# Altium PCB CAN_OD节点V11.PcbDoc
Units mil, origin at the board's own origin, x right, y up, seen from the top; angles counter-clockwise.
Board outline 1115.03 x 910.03 mil, 2 copper layers (Top Layer, Bottom Layer); 34 components, 61 nets, 149 pads, 38 vias.
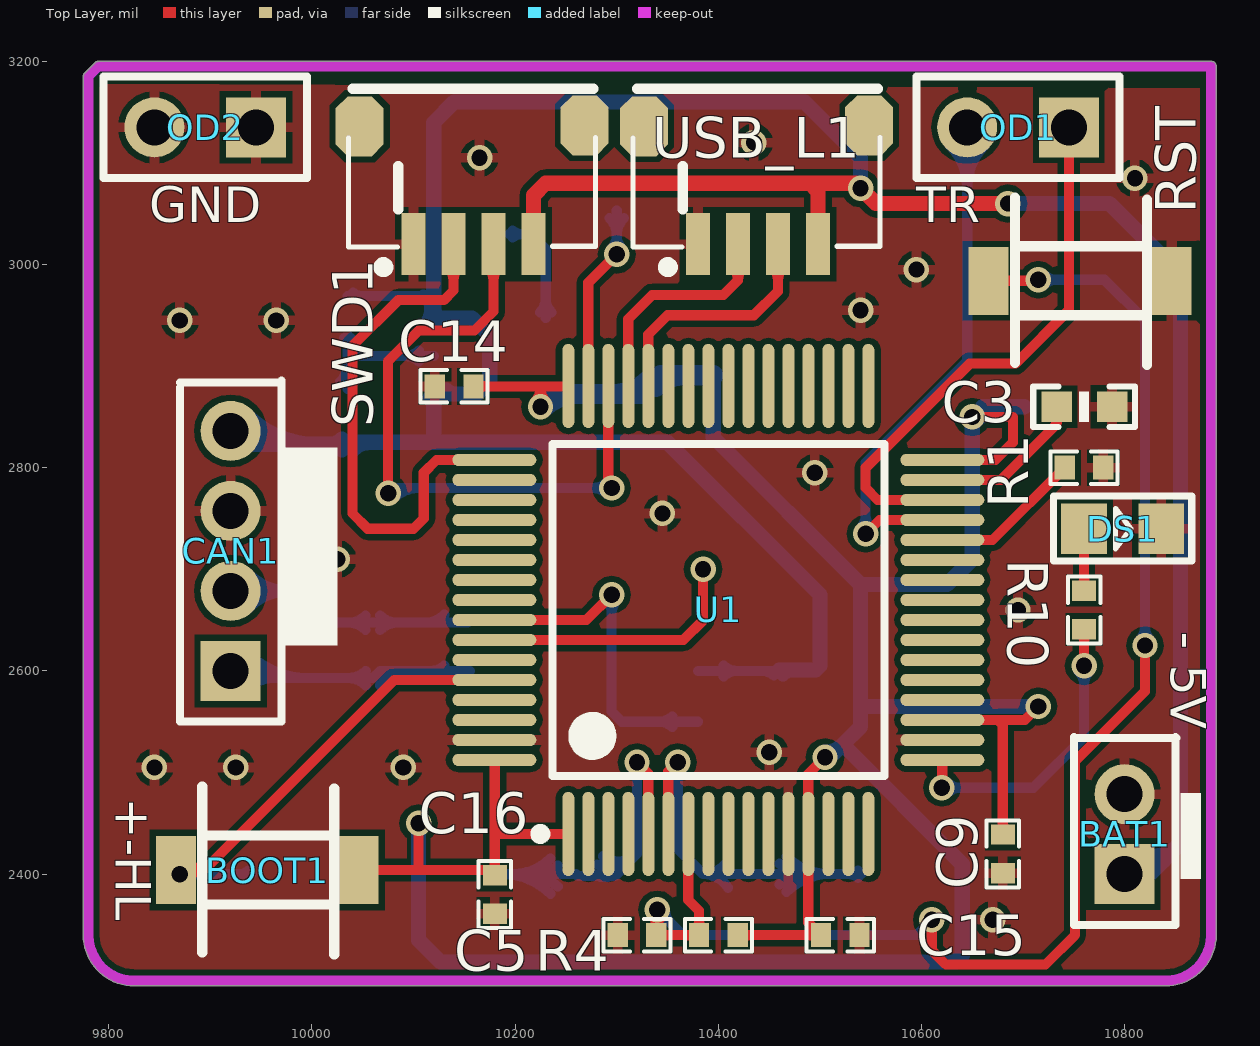
[diagram p0: Top Layer view]
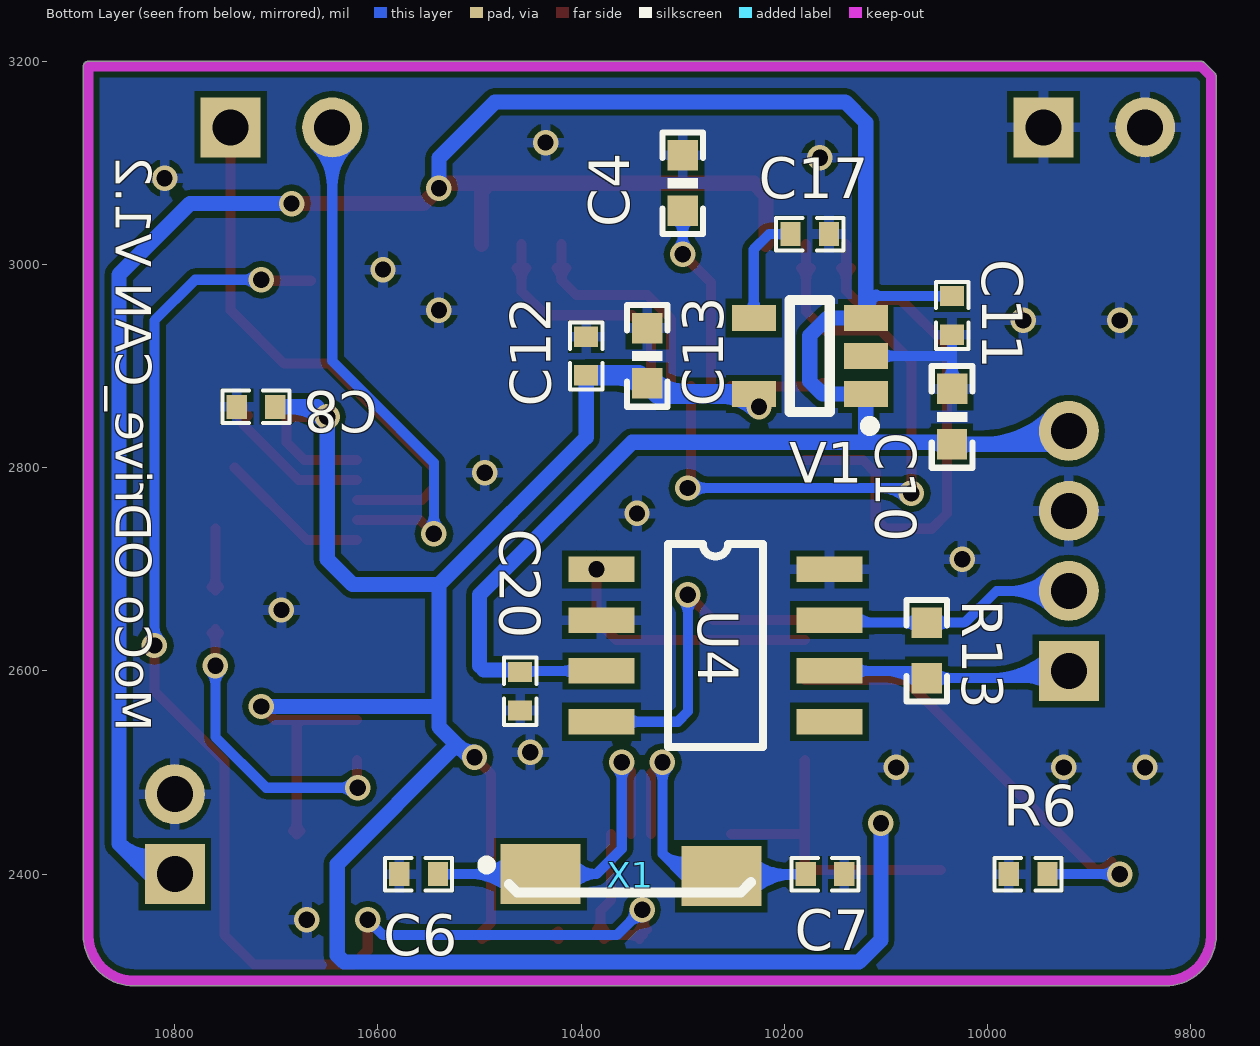
[diagram p1: Bottom Layer view, seen from below]
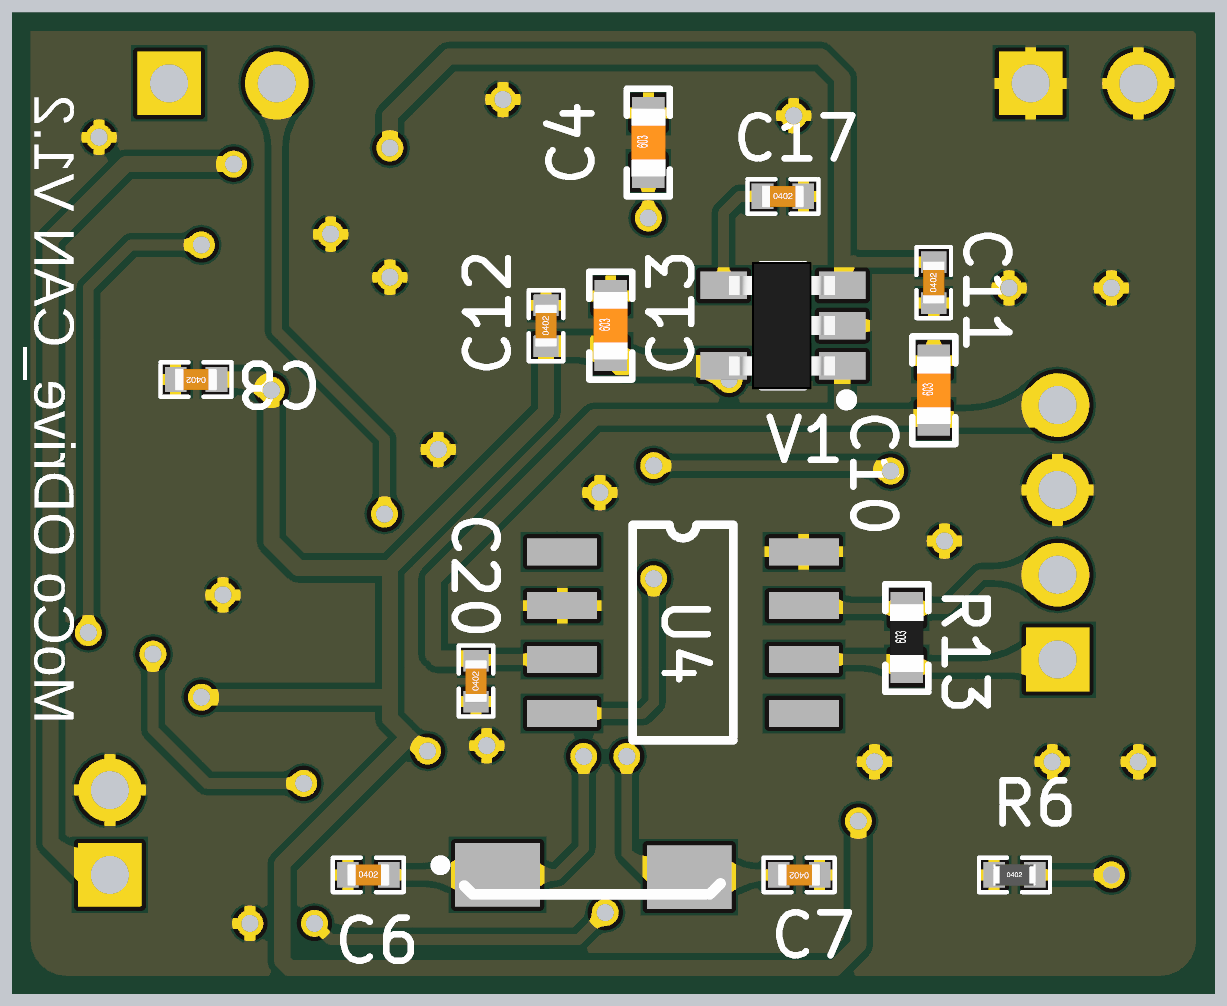
[diagram p2: 3D render of the assembled board from below, using the file's embedded part models]

## Layer stack, top to bottom
Top Layer: signal copper 1.4
Dielectric: dielectric 12.6, FR-4, Dk 4.8
Bottom Layer: signal copper 1.4

## Board outline
9774.99,2340 9774.99,3185 cw(c9780,3185) 9776.47,3188.56 9776.45,3188.55 9786.45,3198.55 9786.44,3198.53 cw(c9790,3195) 9790,3200.01 10885,3200.01 cw(c10885,3195) 10890.01,3195 10890.01,2340 cw(c10840,2340) 10840,2289.99 9825,2289.99 cw(c9825,2340)

## Design rules (kind name [scope] priority, off if disabled: settings)
Clearance [All] p1: gap=6
PolygonConnect [All] p1: connectstyle=Relief reliefconductorwidth=10 reliefentries=4 polygonreliefangle="90 Angle"
RoutingVias [All] p1: holewidth=28 width=50 viastyle="Through Hole" minholewidth=16 minwidth=25 maxholewidth=28 maxwidth=50
SilkscreenOverComponentPads [All] p1: minsilkscreentomaskgap=10
SolderMaskExpansion [All] p1: expansion=4
Width [All] p1: maxlimit=30 minlimit=10 preferedwidth=10 minimp=50.000000 maximp=50.000000 favimp=50.000000
27 further rules are at their usual default settings.

## Components (designator, comment, footprint, x,y, rotation, side; value= is the part's Value field where it differs from the comment)
BAT1 "Header 2" PH2.0-2 10800,2400 r90 top
BOOT1 "Header 2" 663*4*2.0/2.5mm 9920,2420 r0 top
C3 "2.2UF" C0603 10760,2860 r0 top
C4 "2.2UF" C0603 10300,3080 r90 bottom
C5 "10NF" "C 0402" 10320,2340 r0 top
C6 "20PF" "C 0402" 10560,2400 r180 bottom
C7 "20PF" "C 0402" 10160,2400 r0 bottom
C8 "0.1UF" "C 0402" 10720,2860 r0 bottom
C9 "0.1UF" "C 0402" 10680,2420 r270 top
C10 "10uF" C0603 10035,2850 r90 bottom
C11 "0.1uF" "C 0402" 10035,2950 r90 bottom
C12 "0.1uF" "C 0402" 10395,2910 r90 bottom
C13 "10uF" C0603 10335,2910 r90 bottom
C14 "0.1UF" "C 0402" 10140,2880 r180 top
C15 "0.1UF" "C 0402" 10520,2340 r0 top
C16 "0.1UF" "C 0402" 10180,2380 r270 top
C17 "0.1uF" "C 0402" 10175,3030 r180 bottom
C20 "0.1UF" "C 0402" 10460,2580 r90 bottom
CAN1 "Header 4" PH2.0-4 9920,2600 r90 top
DS1 "LED1" SMDLED 10760,2740 r0 top
OD1 "Header 2" HDR1X2 10745,3135 r180 top
OD2 "Header 2" HDR1X2 9945,3135 r180 top
R1 "10K" "R 0402" 10760,2800 r180 top
R4 "10K" "R 0402" 10400,2340 r0 top
R6 "10K" "R 0402" 9960,2400 r180 bottom
R10 "100R" "R 0402" 10760,2660 r90 top
R13 "120R" R0603 10060,2620 r90 bottom
RST "Header 2" 663*4*2.0/2.5mm 10720,3000 r0 top
SWD1 "Header 4" "SH1.0-4P - up" 10100,3020 r0 top
U1 "STM32F405RGT6" LQFP64_M 10400,2660 r90 top
U4 "TJA1050" SOP-8 10380,2700 r180 bottom
USB_L1 "Header 4" "SH1.0-4P - up" 10380,3020 r0 top
V1 "RT9193-3.3/LP2985/SPX3819" SOT23-5 10175,2910 r180 bottom
X1 "8MHZ" PXCL 10440,2400 r270 bottom

## Footprints (in the part's own frame and the unit in brackets; to place one, negate y for a bottom-side part, rotate by r counter-clockwise, add the part's x,y. Pads: shape width x height; smd on the part's side, far side on the other; paste and mask are expansions set on the pad)
663*4*2.0/2.5mm [mil] "小龟按键"
  rect 39.37x66.93 smd: 1(126,-16) 2(-54,-16)
  silkscreen extent -28,-99 102,66
C0603 [mil]
  rect 30x30 smd: 1(-27,0) 2(27.5,-0.06)
  silkscreen extent -50,-20 50,20, body extent -31,-16 31,16, height 12
"C 0402" [mil]
  rect 20x23.62 smd: 1(-19,0) 2(19,0)
  silkscreen extent -33,-16 33,16, body extent -20,-10 20,10, height 20
HDR1X2 [mm] "Connector; Header; 2 Position"
  rect 1.5x1.5 hole 0.9: 1(0,0)
  round 1.5 hole 0.9: 2(2.54,0)
  silkscreen extent -1.27,-1.27 3.81,1.27
LQFP64_M [mm] "Thin QFP, 64-Leads, Body 10x10mm, Pitch 0.5mm, IPC Low Density"
  oval 2.1x0.3 smd: 1(-5.6,3.75) 2(-5.6,3.25) 3(-5.6,2.75) 4(-5.6,2.25) 5(-5.6,1.75) 6(-5.6,1.25) 7(-5.6,0.75) 8(-5.6,0.25) 9(-5.6,-0.25) 10(-5.6,-0.75) 11(-5.6,-1.25) 12(-5.6,-1.75) 13(-5.6,-2.25) 14(-5.6,-2.75) 15(-5.6,-3.25) 16(-5.6,-3.75) 33(5.6,-3.75) 34(5.6,-3.25) 35(5.6,-2.75) 36(5.6,-2.25) 37(5.6,-1.75) 38(5.6,-1.25) 39(5.6,-0.75) 40(5.6,-0.25) 41(5.6,0.25) 42(5.6,0.75) 43(5.6,1.25) 44(5.6,1.75) 45(5.6,2.25) 46(5.6,2.75) 47(5.6,3.25) 48(5.6,3.75)
  oval 0.3x2.1 smd: 17(-3.75,-5.6) 18(-3.25,-5.6) 19(-2.75,-5.6) 20(-2.25,-5.6) 21(-1.75,-5.6) 22(-1.25,-5.6) 23(-0.75,-5.6) 24(-0.25,-5.6) 25(0.25,-5.6) 26(0.75,-5.6) 27(1.25,-5.6) 28(1.75,-5.6) 29(2.25,-5.6) 30(2.75,-5.6) 31(3.25,-5.6) 32(3.75,-5.6) 49(3.75,5.6) 50(3.25,5.6) 51(2.75,5.6) 52(2.25,5.6) 53(1.75,5.6) 54(1.25,5.6) 55(0.75,5.6) 56(0.25,5.6) 57(-0.25,5.6) 58(-0.75,5.6) 59(-1.25,5.6) 60(-1.75,5.6) 61(-2.25,5.6) 62(-2.75,5.6) 63(-3.25,5.6) 64(-3.75,5.6)
  silkscreen extent -5.72,-4.15 4.15,4.57, body extent -5,-5 5,5, height 1.6
PH2.0-2 [mm]
  rect 1.5x1.5 hole 0.9: 1(0,0)
  round 1.5 hole 0.9: 2(2,0)
  silkscreen extent -1.27,-1.3 3.43,1.27
PH2.0-4 [mm]
  rect 1.5x1.5 hole 0.9: 1(0,0)
  round 1.5 hole 0.9: 2(2,0) 3(4,0) 4(6,0)
  silkscreen extent -1.27,-1.27 7.26,1.27
PXCL [mm]
  rect 1.5x2 smd: 1(0,0) 2(0.051,4.521)
  silkscreen extent -0.34,-1.45 0.46,5.26
R0603 [mil]
  rect 30x30 smd: 1(-27,0) 2(27.5,-0.06)
  silkscreen extent -50,-20 50,20, body extent -31,-16 31,16, height 12
"R 0402" [mil]
  rect 20x23.62 smd: 1(-19,0) 2(19,0)
  silkscreen extent -33,-16 33,16, body extent -20,-10 20,10, height 12
"SH1.0-4P - up" [mm]
  rect 0.6x1.55 smd: 1(0,0) 2(1,0) 3(2,0) 4(3,0)
  oct 1.2x1.5 smd: 1.(4.279,2.972) A(-1.346,2.946)
  silkscreen extent -1.63,-0.7 4.55,3.89
SMDLED [mil]
  rect 45x50 smd: 1(0,0) 2(76.01,0)
  silkscreen extent -30,-32 106,32
SOP-8 [mil]
  rect 65x25 smd: 1(0,0) 2(0,-50) 3(0,-100) 4(0,-150) 5(224.41,-150) 6(224.41,-100) 7(224.41,-50) 8(224.41,0)
  silkscreen extent 65,-175 159,25
SOT23-5 [mm]
  rect 1.1x0.65 smd: 1(1.4,-0.95) 2(1.4,0) 3(1.4,0.95) 4(-1.4,0.95) 5(-1.4,-0.95)
  silkscreen extent -0.5,-1.87 1.62,1.4, body extent -1.28,-1.5 1.22,1.5, height 1.05

## Part data
BAT1 BOOT1 OD1 OD2 RST: "Header, 2-Pin"
C3 C4: library part CAP1, "胆电容"
C5 C8 C9 C10 C12 C13 C14 C15 C16 C20: library part CAP, "Capacitor"
C6 C7: library part C2, "0805"
C11 C17: library part Capacitor, "普通电容"
CAN1 SWD1 USB_L1: "Header, 4-Pin"
DS1: library part LED2, "Typical RED, GREEN, YELLOW, AMBER GaAs LED"
R1 R4 R6 R10 R13: library part Res2, "0603"
U4: library part SN65HVD230D
V1: "降压IC"
X1: library part XTAL, "Crystal Oscillator"

## Via types
v1: diameter 25, hole 16, Top Layer to Bottom Layer, 38 vias

## Nets (pads, with @x,y where several pads share a name; then routed paths per layer and width w, separated by ;. In a path a pad name is that pad's centre, name@x,y a point inside that pad or via, vN(x,y) a via of type N, cw(c..) or ccw(c..) an arc to the next point about the centre after c; other vN are vias at no path point)
3.3V: BOOT1.1 C8.1 C9.1 C12.1 C13.1 C14.1 C15.1 C16.1 R4.2 U1.1 U1.13 U1.19 U1.32 U1.48 U1.64 V1.5 | length 3415.2
  Top Layer w10: BOOT1.1 10105,2404 ; v1(10105,2450) 10105,2404 ; C14.1 10225,2880 ; C14.1@10162.54,2876.46 cw(c10171.07,2867.93) 10171.07,2880 cw(c10171.07,2892.07) C14.1@10162.54,2883.54 ; C16.1@10176.46,2402.54 ccw(c10167.93,2411.07) 10180,2411.07 ccw(c10192.07,2411.07) C16.1@10183.54,2402.54 ; U1.64 10180,2511.89 10180,2440 ; v1@10219.7,2865.3 ccw(c10206.89,2878.11) 10225,2878.11 ccw(c10243.11,2878.11) v1@10230.3,2865.3 ; v1(10225,2860) 10225,2880 ; U1.1 10180.47,2439.53 10180,2440 ; U1.48 10251.89,2880 10225,2880 ; R4.2 C15.1 10488.58,2352.42 U1.13 10488.58,2498.58 v1(10505,2515) ; R4.2@10422.54,2336.46 cw(c10431.07,2327.93) 10431.07,2340 cw(c10431.07,2352.07) R4.2@10422.54,2343.54 ; C15.1@10497.46,2336.46 ccw(c10488.93,2327.93) 10488.93,2340 ccw(c10488.93,2352.07) C15.1@10497.46,2343.54 ; U1.19 10675,2551.73 ; U1.32 10672.64,2807.64 10690,2825 10690,2850 v1(10650,2850) ; C9.1@10676.46,2442.54 ccw(c10667.93,2451.07) 10680,2451.07 ccw(c10692.07,2451.07) C9.1@10683.54,2442.54 ; C9.1 10680,2546.73 10675,2551.73 ; v1(10715,2565) 10701.73,2551.73 10675,2551.73 ; 10105,2404 10175,2404 C16.1 10180,2440
  Bottom Layer w10: v1(10225,2860) V1.5@10225,2867.48
  Bottom Layer w15: v1(10105,2450) 10105,2335 10126.5,2313.5 10633.5,2313.5 10640,2320 10640,2410 10522.5,2527.5 ; C12.1 10395,2830 10540,2685 ; v1@10505,2520 ccw(c10505,2544.14) 10522.07,2527.07 ; v1@10510,2515 10522.5,2527.5 ; v1(10650,2850) 10650,2710 10625,2685 10540,2685 ; v1@10653.54,2846.46 cw(c10686.21,2813.79) 10686.21,2860 ; 10660,2860 C8.1 ; v1(10715,2565) 10540,2565 ; 10522.5,2527.5 10540,2545 10540,2565 ; 10540,2565 10540,2685
  Bottom Layer w20: v1@10226.77,2858.23 cw(c10261.45,2823.55) 10261.45,2872.6 ; V1.5 10324.6,2872.6 10343,2891 C12.1 ; 10297.82,2872.6 ccw(c10297.82,2920.18) C13.1@10331.46,2886.54 ; C13.1@10338.54,2879.46 cw(c10366.38,2851.62) 10366.38,2891
5V: BAT1.1 C10.1 C11.2 C20.2 CAN1.4 SWD1.4 U4.3 USB_L1.4 V1.1 V1.3 | length 3644.6
  Top Layer w15: SWD1.4 10218.11,3068.11 10230,3080 10490,3080 ; USB_L1.4 10498.11,3071.89 10490,3080 ; v1(10685,3060) 10555,3060 v1(10540,3075) 10535,3080 10490,3080
  Bottom Layer w10: C11.2 10111,2969 10119.88,2960.12 V1.3 ; C11.2@10040.35,2965.46 cw(c10048.88,2956.93) 10048.88,2969 cw(c10048.88,2981.07) C11.2@10040.35,2972.54 ; 10109.58,2970.42 cw(c10095.31,2956.14) V1.3@10112.95,2946.33 ; 10118.95,2961.05 cw(c10107.35,2949.45) V1.3@10121.69,2941.47 ; U4.3 10459,2600 C20.2@10460,2601 ; U4.3@10405.3,2594.7 cw(c10418.11,2581.89) 10418.11,2600 cw(c10418.11,2618.11) U4.3@10405.3,2605.3 ; 10443.7,2600 cw(c10443.7,2584.51) C20.2@10454.65,2595.46
  Bottom Layer w15: CAN1.4 9933.22,2823 C10.1 10037,2825 10120,2825 ; CAN1.4@9924.97,2841.19 ccw(c9968.88,2885.1) 9968.88,2823 ; CAN1.4@9935.58,2851.8 ccw(c10005.1,2921.32) 10005.1,2823 ; C10.1@10029.7,2817.7 ccw(c10016.89,2804.89) 10016.89,2823 ccw(c10016.89,2841.11) C10.1@10029.7,2828.3 ; C10.1@10040.3,2817.7 cw(c10057.93,2800.07) 10057.93,2825 ; V1.1@10116.14,2868.85 cw(c10106.81,2859.53) 10120,2859.53 ; V1.1 V1.1@10120,2872.48 ; V1.1@10132.48,2876.34 ccw(c10141.81,2885.67) 10141.81,2872.48 ; C20.2@10460,2601 10496,2601 ; C20.2@10463.58,2597.23 cw(c10472.67,2588.14) 10472.67,2601 ; 10500,2605 10500,2675 10350,2825 10120,2825 ; v1(10540,3075) 10540,3105 10485,3160 10140,3160 10119.88,3139.88 V1.3 10157.6,2947.4 10175,2930 10175,2885 10162.48,2872.48 V1.1@10120,2872.48 ; v1(10685,3060) 10785,3060 10855,2990 10855,2535 10855,2430 ; BAT1.1 10825,2400 10855,2430 ; BAT1.1@10802.62,2406.52 ccw(c10815.16,2437.72) 10838.94,2413.94 ; BAT1.1@10808.22,2420.44 ccw(c10824.37,2460.63) 10855,2430 ; 10120,2825 V1.1@10120,2872.48
BAT: U1.20
BEEP: U1.59
CAN_RX1: U1.61
CAN_RX2: U1.57 U4.4 | length 386.8
  Top Layer w10: U1.57 10270.16,2650.16 v1(10295,2675)
  Bottom Layer w10: v1@10289.7,2669.7 cw(c10276.89,2656.89) 10295,2656.89 cw(c10313.11,2656.89) v1@10300.3,2669.7 ; v1(10295,2675) 10295,2560 10305,2550 U4.4 ; U4.4@10354.7,2544.7 ccw(c10341.89,2531.89) 10341.89,2550 ccw(c10341.89,2568.11) U4.4@10354.7,2555.3
CAN_TX1: U1.62
CAN_TX2: U1.58 U4.1 | length 263.6
  Top Layer w10: U1.58 10365.47,2630.47 10385,2650 v1(10385,2700)
CS_BARO: U1.33
CS_FLASH: U1.41
CS_HML: U1.50
CS_IMU: U1.21
CS_NRF: U1.24
DM: U1.44 USB_L1.3 | length 268
  Top Layer w10: U1.44 10331.1,2931.1 10350,2950 10435,2950 10458.74,2973.74 USB_L1.3 ; USB_L1.3@10453.92,2996.48 cw(c10442.3,2984.86) 10458.74,2984.86 cw(c10475.18,2984.86) USB_L1.3@10463.56,2996.48
DP: U1.45 USB_L1.2 | length 251.1
  Top Layer w10: U1.45 10311.42,2946.42 10335,2970 10405,2970 10419.37,2984.37 USB_L1.2 ; USB_L1.2@10414.55,2996.48 cw(c10402.93,2984.86) 10419.37,2984.86 cw(c10435.81,2984.86) USB_L1.2@10424.19,2996.48
EN_POWER: U1.25
GND: BAT1.2 C3.2 C4.2 C5.1 C6.1 C7.1 C8.2 C9.2 C10.2 C11.1 C12.2 C13.2 C14.2 C15.2 C16.2 C17.2 C20.1 CAN1.3 DS1.2 OD2.1 OD2.2 R1.1 R6.1 RST.1 SWD1.1 U1.12 U1.18 U1.63 U4.2 U4.8 USB_L1.1 V1.2 | length 224.9
  Bottom Layer w10: C10.2@10027.86,2884.57 ccw(c10010.64,2901.8) 10035,2901.8 ; C11.1@10031.46,2927.46 cw(c10022.93,2918.93) 10035,2918.93 cw(c10047.07,2918.93) C11.1@10038.54,2927.46 ; C10.2 10035,2877.56 C11.1 ; 10035,2901.49 ccw(c10058.92,2901.49) C10.2@10042.01,2884.57 ; 10035,2910 V1.2 ; V1.2@10105.51,2904.49 ccw(c10092.2,2891.18) 10092.2,2910 ccw(c10092.2,2928.82) V1.2@10105.51,2915.51
  other v1: 10670,2355 9845,2505 9925,2505 10090,2505 10450,2520 10695,2660 10025,2710 10345,2755 10495,2795 9870,2945 9965,2945 10540,2955 10595,2995 10810,3085 10165,3105 10435,3120
GROUND1: U1.8
GROUND2: U1.9
GROUND3: U1.10
GROUND4: U1.11
LED1: R10.1 U1.17 | length 370.1
  Top Layer w10: v1(10620,2485) 10620.47,2485.47 U1.17 ; R10.1@10756.46,2637.46 cw(c10747.93,2628.93) 10760,2628.93 cw(c10772.07,2628.93) R10.1@10763.54,2637.46 ; v1(10760,2605) R10.1
  Bottom Layer w10: v1(10620,2485) 10710,2485 10760,2535 v1(10760,2605) ; v1@10625.3,2479.7 cw(c10638.11,2466.89) 10638.11,2485 cw(c10638.11,2503.11) v1@10625.3,2490.3 ; v1@10754.7,2599.7 cw(c10741.89,2586.89) 10760,2586.89 cw(c10778.11,2586.89) v1@10765.3,2599.7
LED2: U1.56
NetBOOT1_2: BOOT1.2 R6.2 U1.60 | length 573.3
  Top Layer w10: v1(9870,2400) BOOT1.2 9894,2404 ; BOOT1.2@9875.85,2395.3 cw(c9894,2380.71) 9894,2404 ; BOOT1.2@9878.08,2395.65 cw(c9894,2384.65) 9894,2404 ; BOOT1.2@9878.08,2412.35 ccw(c9894,2423.35) 9894,2404 ; U1.60 10081.1,2591.1 9894,2404
  Bottom Layer w10: v1(9870,2400) R6.2 ; v1@9875.3,2394.7 cw(c9888.11,2381.89) 9888.11,2400 cw(c9888.11,2418.11) v1@9875.3,2405.3 ; R6.2@9937.46,2396.46 ccw(c9928.93,2387.93) 9928.93,2400 ccw(c9928.93,2412.07) R6.2@9937.46,2403.54
NetC3_1: C3.1 U1.31 | length 172.4
  Top Layer w10: U1.31 10677.95,2787.95 10733,2843 ; C3.1@10728.14,2851.26 cw(c10723.55,2843) 10733,2843 ; C3.1 10733,2843 ; C3.1@10737.86,2851.26 ccw(c10742.45,2843) 10733,2843
NetC4_1: C4.1 U1.47 | length 250.5
  Top Layer w10: U1.47 10272.05,2982.05 v1(10300,3010)
  Bottom Layer w10: C4.1@10292.93,3045.93 cw(c10275.86,3028.86) 10300,3028.86 cw(c10324.14,3028.86) C4.1@10307.07,3045.93 ; v1@10294.7,3015.3 ccw(c10281.89,3028.11) 10300,3028.11 ccw(c10318.11,3028.11) v1@10305.3,3015.3 ; v1(10300,3010) C4.1
NetC5_2: C5.2 R4.1 RST.2 U1.7 | length 1640.9
  Top Layer w10: v1@10334.7,2359.7 cw(c10324.31,2349.31) C5.2@10339,2349.31 ; C5.2@10335.46,2345.35 ccw(c10326.93,2353.88) 10339,2353.88 ccw(c10351.07,2353.88) C5.2@10342.54,2345.35 ; C5.2@10339,2344.48 cw(c10360.52,2344.48) v1@10345.3,2359.7 ; v1(10340,2365) 10339,2364 C5.2 10365,2340 R4.1 10381,2364 10370.47,2374.53 U1.7 ; C5.2@10342.54,2336.46 cw(c10351.07,2327.93) 10351.07,2340 cw(c10351.07,2352.07) C5.2@10342.54,2343.54 ; R4.1@10377.46,2336.46 ccw(c10368.93,2327.93) 10368.93,2340 ccw(c10368.93,2352.07) R4.1@10377.46,2343.54 ; R4.1@10377.46,2345.35 ccw(c10368.93,2353.88) 10381,2353.88 ccw(c10393.07,2353.88) R4.1@10384.54,2345.35 ; v1(10610,2355) 10610,2325 10624,2311 10720,2311 10722,2311 10751,2340 10751,2511 10820,2580 v1(10820,2625) ; RST.2 10714,2984 v1(10715,2985)
  Bottom Layer w10: v1@10340,2357.5 cw(c10340,2339.39) 10352.8,2352.2 cw(c10365.61,2365) v1@10347.5,2365 ; v1(10340,2365) 10365,2340 10595,2340 v1(10610,2355) ; v1(10715,2985) 10780,2985 10820,2945 v1(10820,2625) ; v1@10720.3,2979.7 cw(c10733.11,2966.89) 10733.11,2985 cw(c10733.11,3003.11) v1@10720.3,2990.3 ; v1@10814.7,2630.3 ccw(c10801.89,2643.11) 10820,2643.11 ccw(c10838.11,2643.11) v1@10825.3,2630.3
NetC6_2: C6.2 U1.6 X1.1 | length 604.5
  Top Layer w10: U1.6 10350.79,2500.79 v1(10360,2510)
  Bottom Layer w10: v1@10354.7,2504.7 cw(c10341.89,2491.89) 10360,2491.89 cw(c10378.11,2491.89) v1@10365.3,2504.7 ; v1(10360,2510) 10360,2425 10385,2400 ; X1.1@10409.58,2386.65 ccw(c10385,2370.7) 10385,2400 ; X1.1@10409.58,2413.35 cw(c10385,2429.3) 10385,2400 ; X1.1@10460.12,2389.73 cw(c10484.92,2364.93) 10484.92,2400 cw(c10484.92,2435.07) X1.1@10460.12,2410.27 ; X1.1@10467.19,2382.66 cw(c10509.06,2340.79) 10509.06,2400 cw(c10509.06,2459.21) X1.1@10467.19,2417.34 ; C6.2@10537.46,2396.46 ccw(c10528.93,2387.93) 10528.93,2400 ccw(c10528.93,2412.07) C6.2@10537.46,2403.54 ; C6.2 X1.1 10385,2400
NetC7_2: C7.2 U1.5 X1.2 | length 614.1
  Top Layer w10: v1(10320,2510) 10331.1,2498.9 U1.5
  Bottom Layer w10: C7.2 10260,2400 X1.2 10298,2398 10320,2420 ; C7.2@10182.54,2396.46 cw(c10191.07,2387.93) 10191.07,2400 cw(c10191.07,2412.07) C7.2@10182.54,2403.54 ; C7.2@10188.11,2400 cw(c10188.11,2333.96) X1.2@10234.81,2380.66 ; 10197.77,2400 ccw(c10197.77,2452.39) X1.2@10234.81,2415.34 ; 10212.26,2400 cw(c10212.26,2358.1) X1.2@10241.88,2387.73 ; 10221.91,2400 ccw(c10221.91,2428.24) X1.2@10241.88,2408.27 ; X1.2@10274.56,2401.62 ccw(c10287.93,2419.45) 10303.69,2403.69 ; X1.2@10280.56,2409.62 ccw(c10294.92,2428.77) 10311.85,2411.85 ; X1.2@10286.56,2417.62 ccw(c10301.91,2438.09) 10320,2420 ; v1@10314.7,2504.7 cw(c10301.89,2491.89) 10320,2491.89 cw(c10338.11,2491.89) v1@10325.3,2504.7 ; v1(10320,2510) 10320,2420
NetC17_1: C17.1 V1.4 | length 158.4
  Bottom Layer w10: C17.1 10215,3030 10230.12,3014.88 V1.4 ; C17.1@10197.54,3026.46 cw(c10206.07,3017.93) 10206.07,3030 cw(c10206.07,3042.07) C17.1@10197.54,3033.54 ; V1.4@10224.61,2952.91 ccw(c10211.3,2966.22) 10230.12,2966.22 ccw(c10248.94,2966.22) V1.4@10235.63,2952.91
NetCAN1_1: CAN1.1 R13.1 U4.6 | length 503.6
  Bottom Layer w10: CAN1.1 9927,2593 R13.1 ; CAN1.1@9930.27,2610.27 ccw(c9971.97,2651.97) 9971.97,2593 ; CAN1.1@9937.34,2582.66 cw(c9962.32,2557.68) 9962.32,2593 ; CAN1.1@9937.34,2617.34 ccw(c9996.11,2676.11) 9996.11,2593 ; R13.1@10052.93,2585.93 ccw(c10035.86,2568.86) 10035.86,2593 ccw(c10035.86,2617.14) R13.1@10052.93,2600.07 ; R13.1@10067.07,2585.93 cw(c10101.04,2551.96) 10101.04,2600 ; 10076.9,2600 ccw(c10076.9,2576.1) R13.1 ; U4.6@10130.29,2594.7 ccw(c10117.48,2581.89) 10117.48,2600 ccw(c10117.48,2618.11) U4.6@10130.29,2605.3 ; U4.6 10067,2600 R13.1
NetCAN1_2: CAN1.2 R13.2 U4.7 | length 494.4
  Bottom Layer w10: CAN1.2 9991.26,2678.74 10022.5,2647.5 R13.2 10153.09,2647.5 U4.7 ; CAN1.2@9930.27,2668.47 cw(c9955.07,2643.67) 9955.07,2678.74 cw(c9955.07,2713.81) CAN1.2@9930.27,2689.01 ; CAN1.2@9937.34,2661.4 cw(c9979.21,2619.53) 9979.21,2678.74 cw(c9979.21,2737.95) CAN1.2@9937.34,2696.08 ; R13.2@10052.86,2640.43 ccw(c10035.79,2623.36) 10035.79,2647.5 ccw(c10035.79,2671.64) R13.2@10052.86,2654.57 ; R13.2@10067.01,2640.43 cw(c10084.08,2623.36) 10084.08,2647.5 cw(c10084.08,2671.64) R13.2@10067.01,2654.57 ; 10111.45,2647.5 ccw(c10111.45,2674.14) U4.7@10130.29,2655.3
NetDS1_1: DS1.1 R10.2 | length 80
  Top Layer w10: R10.2@10756.46,2682.54 ccw(c10747.93,2691.07) 10760,2691.07 ccw(c10772.07,2691.07) R10.2@10763.54,2682.54 ; R10.2 DS1.1
NetR1_2: R1.2 U1.28 | length 150
  Top Layer w10: U1.28 10669.9,2728.9 R1.2
NRF_CE: U1.2
PWM1: U1.14
PWM2: U1.15
PWM3: U1.16
PWM5: U1.22
PWM6: U1.23
PWM7: U1.26
PWM8: U1.27
PWM9: U1.37
PWM10: U1.38
PWM11: U1.39
PWM12: U1.40
SBUS: U1.54
SCL_B: U1.3
SCLK_FC: SWD1.2 U1.49 | length 558.5
  Top Layer w10: SWD1.2@10134.55,2996.48 cw(c10122.93,2984.86) 10139.37,2984.86 cw(c10155.81,2984.86) SWD1.2@10144.19,2996.48 ; SWD1.2 10139.37,2974.37 10130,2965 10085,2965 10040,2920 10040,2755 10055,2740 10100,2740 10110,2750 10110,2795 10122.64,2807.64 U1.49
SDA_B: U1.4
SPI2_CK: U1.34
SPI2_SI: U1.36
SPI2_SO: U1.35
SPI3_CK: U1.51
SPI3_SI: U1.53
SPI3_SO: U1.52
SWD_FC: SWD1.3 U1.46 | length 726
  Top Layer w10: v1(10075,2775) 10075,2905 10105,2935 10160,2935 10178.74,2953.74 SWD1.3 ; SWD1.3@10173.92,2996.48 cw(c10162.3,2984.86) 10178.74,2984.86 cw(c10195.18,2984.86) SWD1.3@10183.56,2996.48 ; U1.46 10291.73,2783.27 v1(10295,2780)
  Bottom Layer w10: v1(10075,2775) 10080,2780 v1(10295,2780) ; v1@10080.3,2769.7 cw(c10105.18,2744.82) 10105.18,2780 ; v1@10289.7,2774.7 ccw(c10276.89,2761.89) 10276.89,2780 ccw(c10276.89,2798.11) v1@10289.7,2785.3
UART1_R_1: U1.43
UART1_T_1: U1.42
UART3_R_1: OD1.1 U1.30 | length 544.5
  Top Layer w10: U1.30 10556.73,2768.27 10545,2780 10545,2800 10647.5,2902.5 10692.5,2902.5 10745,2955 OD1.1
UART3_T_1: OD1.2 U1.29 | length 699.1
  Top Layer w10: v1(10545,2735) 10558.58,2748.58 U1.29
  Bottom Layer w10: v1@10539.7,2740.3 ccw(c10526.89,2753.11) 10545,2753.11 ccw(c10563.11,2753.11) v1@10550.3,2740.3 ; v1(10545,2735) 10545,2805 10612.5,2872.5 10630,2890 10645,2905 OD1.2 ; OD1.2@10627.66,3117.66 cw(c10585.79,3075.79) 10645,3075.79 cw(c10704.21,3075.79) OD1.2@10662.34,3117.66 ; OD1.2@10634.73,3124.73 cw(c10609.93,3099.93) 10645,3099.93 cw(c10680.07,3099.93) OD1.2@10655.27,3124.73
pads on no net: SWD1.1. SWD1.A U1.55 U4.5 USB_L1.1. USB_L1.A

## Polygon pours and split planes (outlines as drawn)
GND on Top Layer "Top Layer-No Net" (solid, remove dead copper, pour order 1000): 9749.24,3178.24 9765.94,3163.24 9765.94,2203.24 10906.89,2203.24 10945.84,2238.24 10979.24,2268.24 10979.24,3173.24
GND on Bottom Layer "Top Layer-No Net" (solid, remove dead copper, pour order 1001): 9761.38,3237.77 9761.38,2267.77 9801.58,2232.77 9813.07,2222.77 11042.02,2222.77 11042.02,3202.77 11047.76,3207.77

## Keep-outs
Keep-Out Layer:
  lines w10: 9780,3155 9780,3185 9790,3195 10885,3195 10885,2340 cw(c10840,2340) 10840,2295 9825,2295 cw(c9825,2340) 9780,2340 9780,3175

## Silkscreen, mask and mechanical layers (free items; w line width, h text height)
Top Overlay:
  rectangle: 9970,2625 10025,2820
  rectangle: 10855,2395 10875,2480
  text "GND" at 9840,3030 h60
  text "TR" at 10595,3030 h60
  text "- 5V" at 10833.34,2638.34 h60 r270
  text "+-HL" at 9795,2475 h60 r270
Bottom Overlay:
  text "MoCo ODrive_CAN V1.2" at 10870,2540 h60 r90